# Altium PCB interface.PcbDoc
Units mil, origin at the board's own origin, x right, y up, seen from the top; angles counter-clockwise.
Board outline 1335.98 x 1844.06 mil, 2 copper layers (Top Layer, Bottom Layer); 19 components, 16 nets, 74 pads, 1 vias.
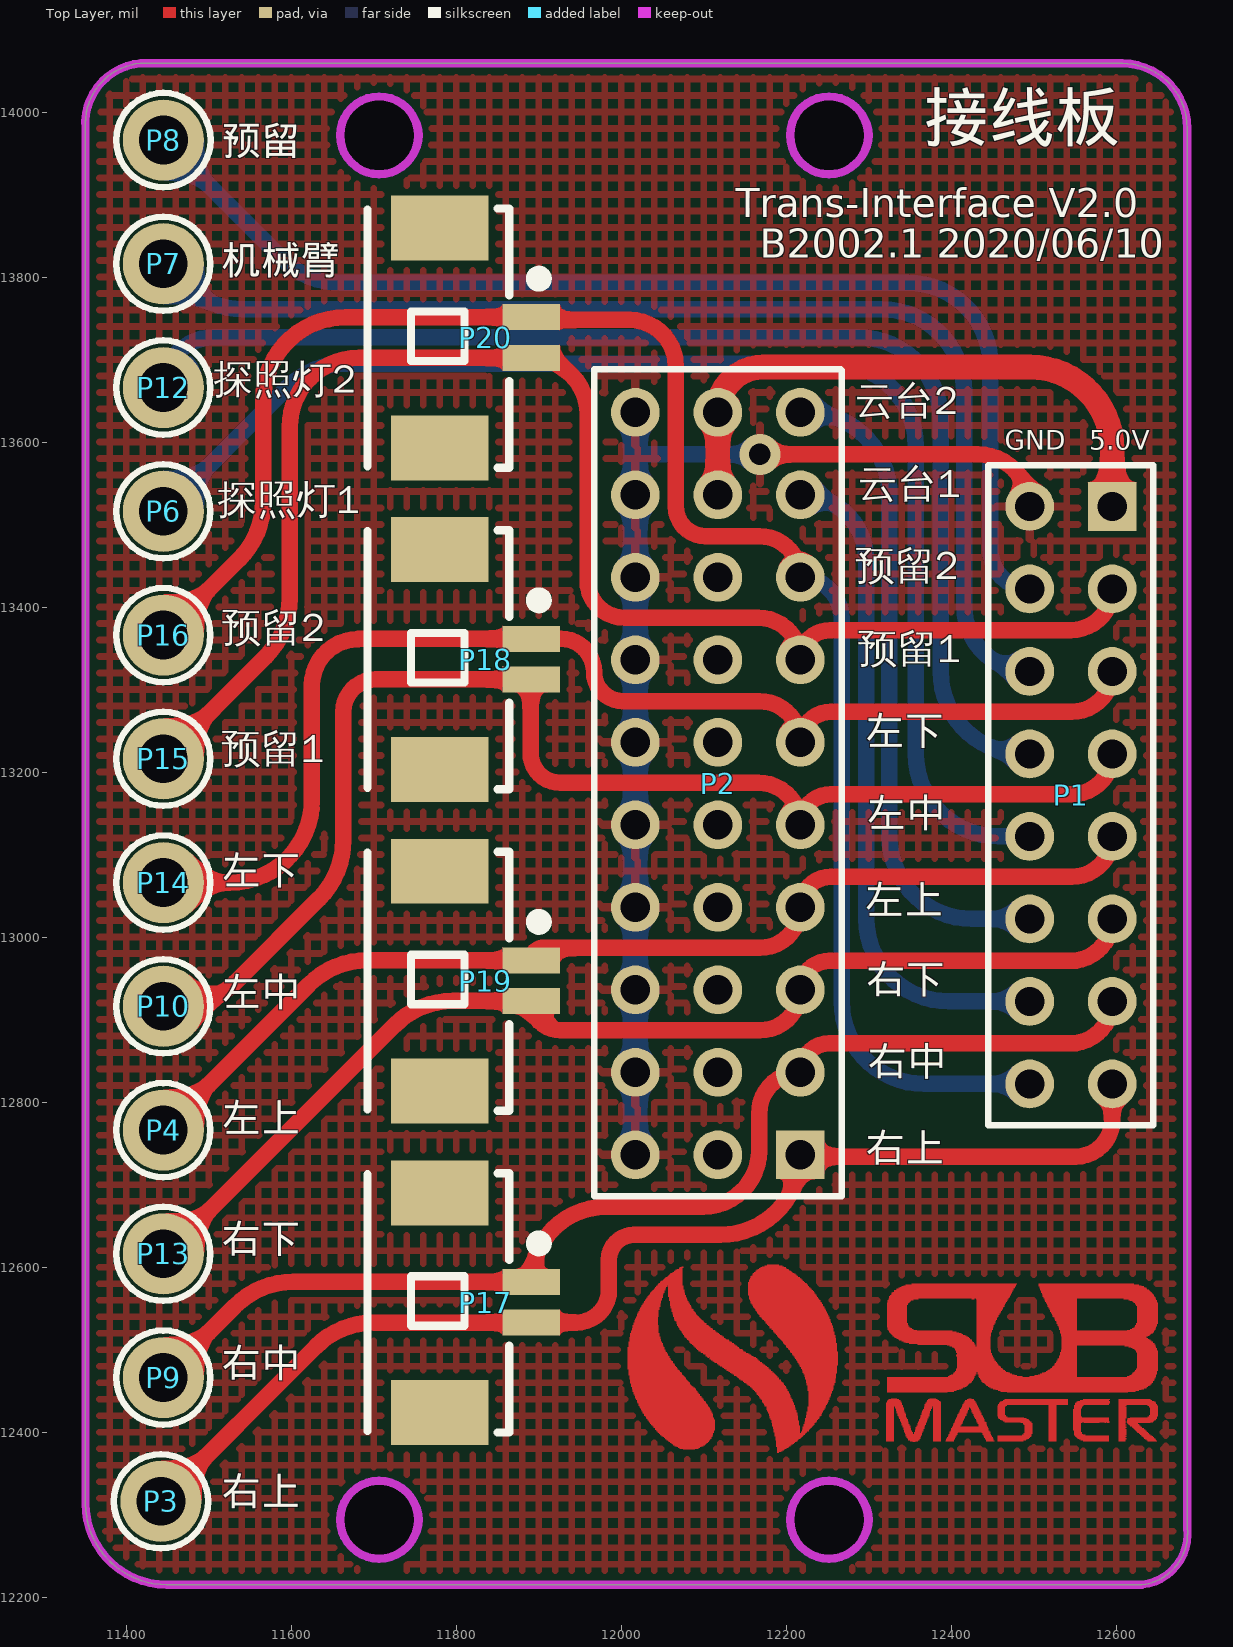
[diagram p0: Top Layer view]
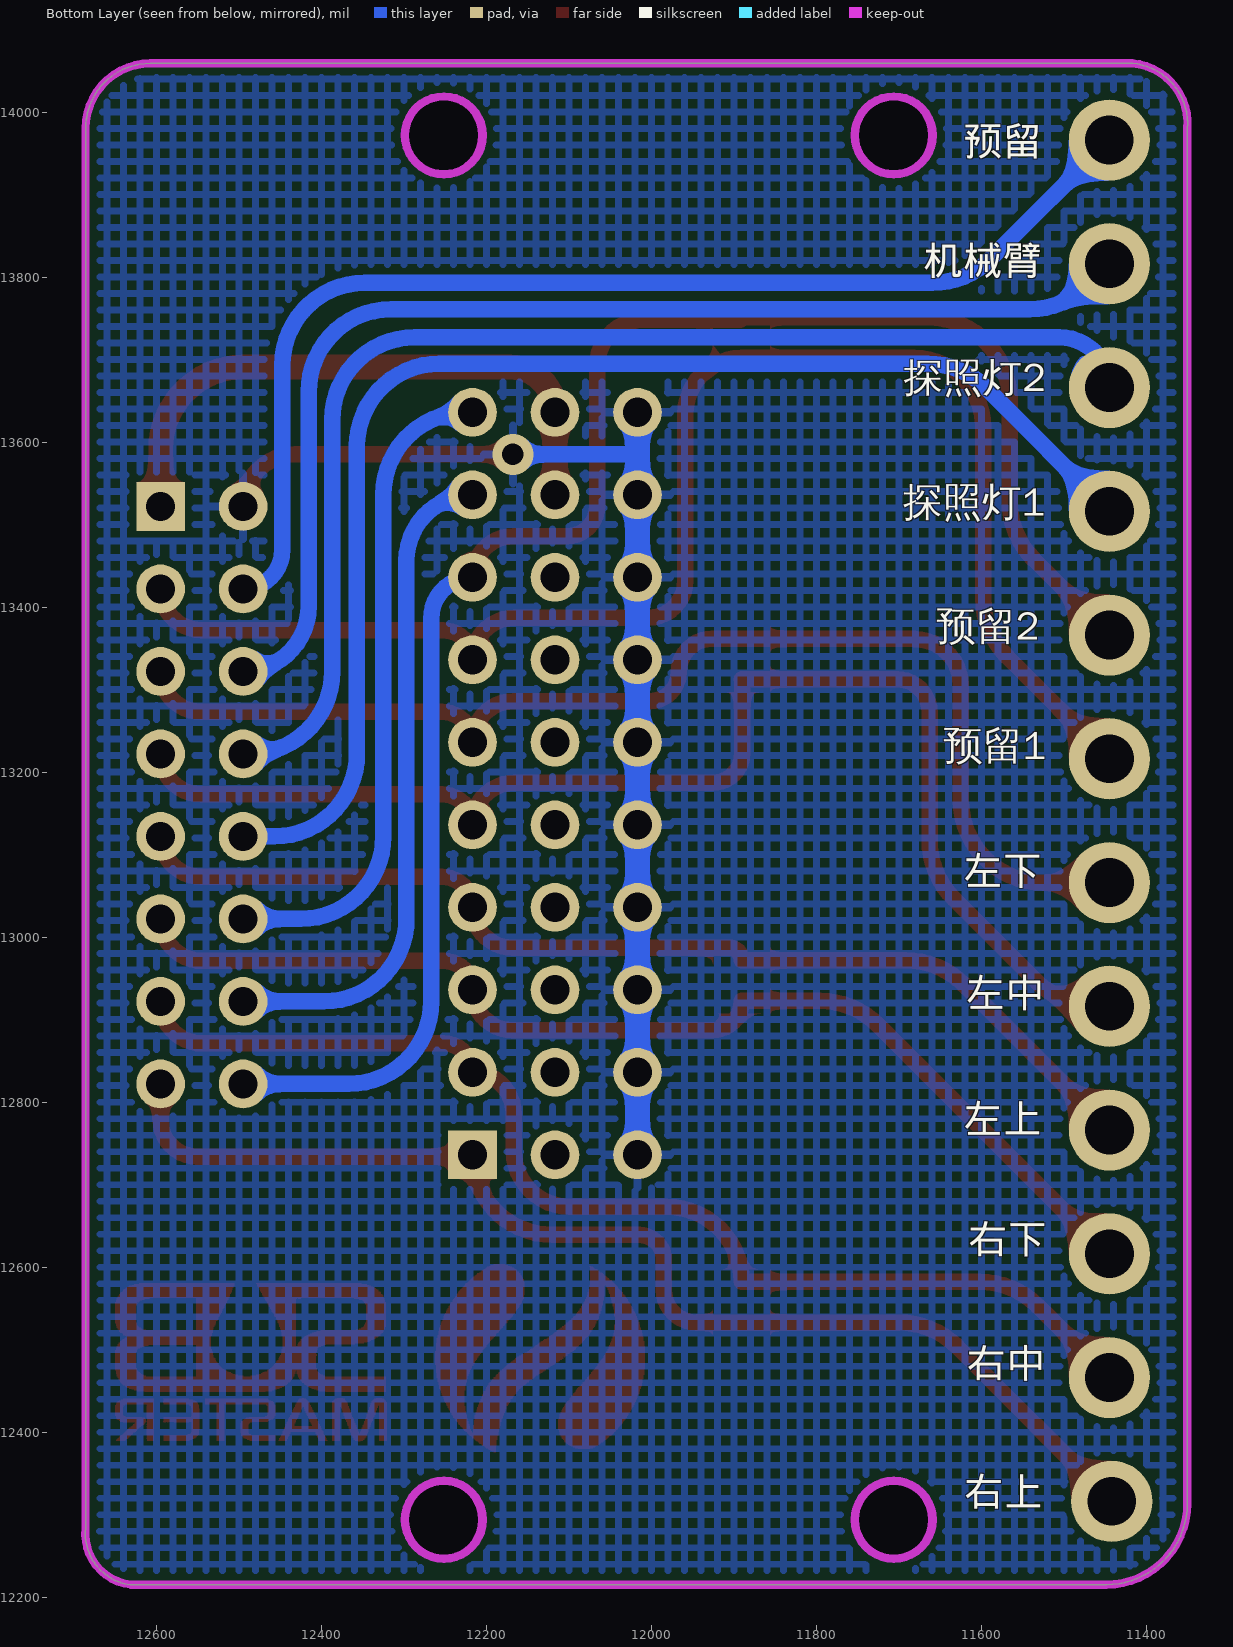
[diagram p1: Bottom Layer view, seen from below]

## Layer stack, top to bottom
Top Solder: solder mask 0.4, Solder Resist, Dk 3.5
Top Layer: signal copper 1.4
Dielectric 1: dielectric 12.6, FR-4, Dk 4.8
Bottom Layer: signal copper 1.4
Bottom Solder: solder mask 0.4, Solder Resist, Dk 3.5

## Board outline
11350.47,12313.53 11350.47,13980.31 cw(c11423.27,13986.26) 11417.32,14059.06 12607.17,14059.06 cw(c12607.17,13980.31) 12685.91,13980.31 12685.91,12283.46 cw(c12624.22,12276.69) 12631,12215 11449,12215 cw(c11449,12313.53)
cut-out: 11711.37,13924.47 cw(c11711.37,13971.72) 11664.13,13971.72 cw(c11711.37,13971.72) 11711.37,14018.96 cw(c11711.37,13971.72) 11758.61,13971.72 cw(c11711.37,13971.72)
cut-out: 12256.65,13924.47 cw(c12256.65,13971.72) 12209.4,13971.72 cw(c12256.65,13971.72) 12256.65,14018.96 cw(c12256.65,13971.72) 12303.89,13971.72 cw(c12256.65,13971.72)
cut-out: 12256.65,12246.45 cw(c12256.65,12293.69) 12209.4,12293.69 cw(c12256.65,12293.69) 12256.65,12340.94 cw(c12256.65,12293.69) 12303.89,12293.69 cw(c12256.65,12293.69)
cut-out: 11711.37,12246.45 cw(c11711.37,12293.69) 11664.13,12293.69 cw(c11711.37,12293.69) 11711.37,12340.94 cw(c11711.37,12293.69) 11758.61,12293.69 cw(c11711.37,12293.69)

## Design rules (kind name [scope] priority, off if disabled: settings)
Clearance Clearance_1 [All] p1: gap=8
ComponentClearance [All] p1: gap=6 collisioncheckmode=3 verticalgap=10 showdistances=FALSE
PolygonConnect [All] p1: connectstyle=Relief reliefconductorwidth=10 reliefentries=4 polygonreliefangle="90 Angle" airgapwidth=10
RoutingVias [All] p1: holewidth=28 width=50 viastyle="Through Hole" minholewidth=28 minwidth=50 maxholewidth=28 maxwidth=50
SolderMaskExpansion [All] p1: expansion=4
Width [All] p1: maxlimit=200 minlimit=5 preferedwidth=10 minimp=50.000000 maximp=50.000000 favimp=50.000000
29 further rules are at their usual default settings.

## Classes and differential pairs
component class interface: P1 P2 P3 P4 P6 P7 P8 P9 P10 P12 P13 P14 P15 P16 P17 P18 P19 P20

## Components (designator, comment, footprint, x,y, rotation, side; value= is the part's Value field where it differs from the comment)
P1 "2X8" "HEADER 2X8 反向" 12486.22,12825.9 r90 top
P2 "Header 10X3" "Header 10x3" 12217,12736 r90 top
P3 "右上" "PIN 1" 11445.94,12316 r270 top
P4 "左上" "PIN 1" 11448.82,12766 r270 top
P6 "探照灯1" "PIN 1" 11444.88,13519.94 r0 top
P7 "机械臂" "PIN 1" 11448.82,13816 r270 top
P8 "预留" "PIN 1" 11448.94,13966 r270 top
P9 "右中" "PIN 1" 11448.82,12466 r270 top
P10 "左中" "PIN 1" 11448.82,12916 r270 top
P12 "探照灯2" "PIN 1" 11444.88,13669.94 r0 top
P13 "右下" "PIN 1" 11448.82,12616 r270 top
P14 "左下" "PIN 1" 11448.82,13066 r270 top
P15 "预留1" "PIN 1" 11448.82,13216 r270 top
P16 "预留2" "PIN 1" 11448.82,13366 r270 top
P17 "2PIN" MX1.25WS-2P 11779,12688.85 r270 top
P18 "2PIN" MX1.25WS-2P 11779,13468.38 r270 top
P19 "2PIN" MX1.25WS-2P 11779,13078.62 r270 top
P20 "2PIN" MX1.25WS-2P 11779,13858.15 r270 top
? "" "Sub master logo" 12123,12483 r0 top

## Footprints (in the part's own frame and the unit in brackets; to place one, negate y for a bottom-side part, rotate by r counter-clockwise, add the part's x,y. Pads: shape width x height; smd on the part's side, far side on the other; paste and mask are expansions set on the pad)
"HEADER 2X8 反向" [mm]
  round 1.5 hole 0.9: 1(-0.099,-2.763) 2(-0.099,-0.223) 3(2.441,-2.763) 4(2.441,-0.223) 5(4.981,-2.763) 6(4.981,-0.223) 7(7.521,-2.763) 8(7.521,-0.223) 9(10.061,-2.763) 10(10.061,-0.223) 11(12.601,-2.763) 12(12.601,-0.223) 13(15.141,-2.763) 14(15.141,-0.223) 16(17.681,-0.223)
  rect 1.5x1.5 hole 0.9: 15(17.681,-2.763)
  silkscreen extent -1.37,-4.03 18.95,1.05, body extent -1.45,-4.03 18.87,1.05, height 7.58
"Header 10x3" [mm]
  rect 1.5x1.5 hole 0.9: 1(0,0)
  round 1.5 hole 0.9: 2(0,2.54) 3(0,5.08) 4(2.54,0) 5(2.54,2.54) 6(2.54,5.08) 7(5.08,0) 8(5.08,2.54) 9(5.08,5.08) 10(7.62,0) 11(7.62,2.54) 12(7.62,5.08) 13(10.16,0) 14(10.16,2.54) 15(10.16,5.08) 16(12.7,0) 17(12.7,2.54) 18(12.7,5.08) 19(15.24,0) 20(15.24,2.54) 21(15.24,5.08) 22(17.78,0) 23(17.78,2.54) 24(17.78,5.08) 25(20.32,0) 26(20.32,2.54) 27(20.32,5.08) 28(22.86,0) 29(22.86,2.54) 30(22.86,5.08)
  silkscreen extent -1.27,-1.27 24.18,6.35, body extent -1.27,-1.27 24.13,6.35, height 7.58
MX1.25WS-2P [mm]
  rect 2x3 smd: 0(-0.029,0.025) 0(6.735,0.025)
  rect 0.8x1.778 smd: 1(2.714,2.836) 2(3.964,2.836)
  silkscreen extent -0.63,-2.2 7.35,3.27, body extent -0.47,-2.07 7.18,3.12, height 3.4
"PIN 1" [mm]
  round 2.5 hole 1.5: 1(0,-0.1)
  silkscreen extent -1.45,-1.55 1.45,1.35
"Sub master logo" [mil]
  Top Layer drawing of 1550 lines, arcs and shapes, not listed

## Part data
P1: library part "Header 2X8"
P3 P4 P6 P7 P8 P9 P10 P12 P13 P14 P15 P16: library part 测试点, "测试点"
P17 P18 P19 P20: library part 接线端子-2PIN
?: library part "Sub Master logo"

## Via types
v1: diameter 50, hole 26, Top Layer to Bottom Layer, 1 vias

## Nets (pads, with @x,y where several pads share a name; then routed paths per layer and width w, separated by ;. In a path a pad name is that pad's centre, name@x,y a point inside that pad or via, vN(x,y) a via of type N, cw(c..) or ccw(c..) an arc to the next point about the centre after c; other vN are vias at no path point)
DGND: P1.16 P2.3 P2.6 P2.9 P2.12 P2.15 P2.18 P2.21 P2.24 P2.27 P2.30 | length 1414.5
  Top Layer w20: v1(12168,13585) 12432.01,13585 cw(c12432.01,13522.04) P1.16
  Bottom Layer w20: 12017,13586 ccw(c12018,13586) 12018,13585 v1(12168,13585)
  Bottom Layer w30: P2.3 P2.6 P2.9 P2.12 P2.15 P2.18 P2.21 P2.24 P2.27 12017,13586 P2.30
PWM0: P1.1 P2.1 P3.1 P17.2 | length 1440.5
  Top Layer w20: P3.1 11629.5,12503.5 cw(c11700.21,12432.79) 11700.21,12532.79 P17.2 11945.53,12532.79 ccw(c11945.53,12572.25) 11985,12572.25 11985,12609 cw(c12015,12609) 12015,12639 12120,12639 ccw(c12120,12736) P2.1 ccw(c12219,12736) 12219,12734 12551,12734 ccw(c12551,12777.97) 12594.97,12777.97 P1.1
PWM1: P1.3 P2.4 P9.1 P17.1 | length 1407.2
  Top Layer w20: P9.1 11531.59,12552.71 cw(c11602.3,12482) 11602.3,12582 P17.1 cw(c11981.65,12582) 11981.65,12673 12099,12673 ccw(c12099,12741) 12167,12741 12167,12786 cw(c12217,12786) P2.4 cw(c12252,12836) 12252,12871 12543.93,12871 ccw(c12543.93,12922.04) P1.3
PWM2: P1.5 P2.7 P13.1 P19.2 | length 1369.8
  Top Layer w20: P13.1 ccw(c11444.88,12623.53) 11450.2,12618.2 11725.26,12893.26 cw(c11795.98,12822.55) 11795.98,12922.55 P19.2 ccw(c11926.21,12922.55) 11926.21,12887 12168,12887 ccw(c12168,12936) P2.7 cw(c12252,12936) 12252,12971 12543.93,12971 ccw(c12543.93,13022.04) P1.5
PWM3: P1.7 P2.10 P4.1 P19.1 | length 1316.8
  Top Layer w20: P4.1 11621.36,12942.48 cw(c11692.07,12871.77) 11692.07,12971.77 P19.1 cw(c11905.89,12971.77) 11905.89,12987 12168,12987 ccw(c12168,13036) P2.10 cw(c12254,13036) 12254,13073 12545.93,13073 ccw(c12545.93,13122.04) P1.7
PWM4: P1.9 P2.13 P10.1 P18.2 | length 1615.9
  Top Layer w20: P10.1 11461.58,12916 ccw(c11461.58,13016) 11532.29,12945.29 11633.71,13046.71 ccw(c11563,13117.42) 11663,13117.42 11663,13273 cw(c11702.32,13273) 11702.32,13312.32 P18.2@11890,13312.32 ; P18.2 P18.2@11890,13312.32 ; P1.9 cw(c12545.93,13222.04) 12545.93,13173 12254,13173 ccw(c12254,13136) P2.13 ccw(c12166,13136) 12166,13187 11926,13187 cw(c11926,13223) 11890,13223 P18.2@11890,13312.32
PWM5: P1.11 P2.16 P14.1 P18.1 | length 1499.4
  Top Layer w20: P14.1 11525,13066 ccw(c11525,13166) 11625,13166 11625,13305 cw(c11681,13305) 11681,13361 11681,13361.53 P18.1 11926.47,13361.53 cw(c11926.47,13321) 11967,13321 ccw(c12002,13321) 12002,13286 12167,13286 cw(c12167,13236) P2.16 cw(c12254,13236) 12254,13273 12545.93,13273 ccw(c12545.93,13322.04) P1.11
PWM6: P1.13 P2.19 P15.1 P20.2 | length 1850.7
  Top Layer w20: P15.1 11568.71,13339.83 ccw(c11498,13410.54) 11598,13410.54 11598,13618 cw(c11682.09,13618) 11682.09,13702.09 P20.2 cw(c11890.65,13633.74) 11959,13633.74 11959,13432 ccw(c12004,13432) 12004,13387 12166,13387 cw(c12166,13336) P2.19 cw(c12253,13336) 12253,13372 12544.93,13372 ccw(c12544.93,13422.04) P1.13
PWM7: P1.2 P2.22 P16.1 P20.1 | length 2140.8
  Top Layer w20: P16.1@11466,13366 P16.1 11536.71,13457.83 ccw(c11466,13528.54) 11566,13528.54 11566,13651.3 cw(c11666,13651.3) 11666,13751.3 P20.1 ccw(c11893.95,13751.3) 11893.95,13748 12010,13748 cw(c12010,13692) 12066,13692 12066,13522 ccw(c12102,13522) 12102,13486 12167,13486 cw(c12167,13436) P2.22
  Bottom Layer w20: P2.22 cw(c12217,13386) 12267,13386 12267,12922.04 ccw(c12367,12922.04) 12367,12822.04 P1.2
PWM8: P1.4 P2.25 | length 814.7
  Bottom Layer w20: P2.25 cw(c12217,13456) 12297,13456 12297,13022.04 ccw(c12397,13022.04) 12397,12922.04 P1.4
PWM9: P1.6 P2.28 | length 806.1
  Bottom Layer w20: P2.28 12225,13636 cw(c12225,13536) 12325,13536 12325,13122.04 ccw(c12425,13122.04) 12425,13022.04 P1.6
PWM10: P1.8 P6.1 | length 1607
  Bottom Layer w20: P6.1 11594.59,13665.71 cw(c11665.3,13595) 11665.3,13695 12257,13695 cw(c12257,13595) 12357,13595 12357,13222.04 ccw(c12457,13222.04) 12457,13122.04 P1.8
PWM11: P1.10 P12.1 | length 1504
  Bottom Layer w20: P12.1 cw(c11505.88,13666) 11505.88,13727 12287,13727 cw(c12287,13627) 12387,13627 12387,13322.04 ccw(c12487,13322.04) 12487,13222.04 P1.10
PWM12: P1.12 P7.1 | length 1430.5
  Bottom Layer w20: P7.1 11470.59,13790.29 ccw(c11541.3,13861) 11541.3,13761 12315.55,13761 cw(c12315.55,13661) 12415.55,13661 12415.55,13401.46 ccw(c12494.97,13401.46) P1.12
PWM13: P1.14 P8.1 | length 1425
  Bottom Layer w20: P8.1 11588.71,13822.29 ccw(c11659.42,13893) 11659.42,13793 12347.44,13793 cw(c12347.44,13693) 12447.44,13693 12447.44,13469.57 ccw(c12494.97,13469.57) P1.14
VDD_5.0V: P1.15 P2.26 P2.29 | length 735.4
  Top Layer w30: P2.26 P2.29 cw(c12172,13636) 12172,13691 12494.97,13691 cw(c12494.97,13591) 12594.97,13591 P1.15
pads on no net: P2.2 P2.5 P2.8 P2.11 P2.14 P2.17 P2.20 P2.23 P17.0 P18.0 P19.0 P20.0

## Polygon pours and split planes (outlines as drawn)
DGND on Bottom Layer "Top Layer-No Net" (hatched 90Degree grid 20 track 8, remove dead copper, pour order 16): 11417.32,14059.06 ccw(c11417.32,13992.2) 11350.47,13992.2 11350.47,13980.31 11350.47,12313.53 ccw(c11449,12313.53) 11449,12215 12617.44,12215 ccw(c12617.44,12283.46) 12685.91,12283.46 12685.91,13980.31 ccw(c12607.17,13980.31) 12607.17,14059.06
DGND on Top Layer "Top Layer-No Net" (solid, remove dead copper, pour order 14): 11417.32,14059.06 ccw(c11417.32,13992.2) 11350.47,13992.2 11350.47,13980.31 11350.47,12313.53 ccw(c11449,12313.53) 11449,12215 12631,12215 ccw(c12631,12269.91) 12685.91,12269.91 12685.91,12283.46 12685.91,13980.31 ccw(c12607.17,13980.31) 12607.17,14059.06

## Keep-outs
Keep-Out Layer:
  circle w10: c11706.37,13971.72 r47.24
  circle w10: c12251.65,13971.72 r47.24
  circle w10: c12251.65,12293.69 r47.24
  circle w10: c11706.37,12293.69 r47.24
  lines w10: 11350.47,12313.53 ccw(c11449,12313.53) 11449,12215 12631,12215 ccw(c12624.22,12276.69) 12685.91,12283.46 12685.91,13980.31 ccw(c12607.17,13980.31) 12607.17,14059.05 12458,14059.06 11417.32,14059.06 ccw(c11423.27,13986.26) 11350.47,13980.31 11350.47,12313.53

## Silkscreen, mask and mechanical layers (free items; w line width, h text height)
Top Overlay:
  text "接线板" at 12366,13946 h100
  text "Trans-Interface V2.0" at 12138.42,13861 h60
  text "B2002.1 2020/06/10" at 12167.67,13812 h60
  text "云台2" at 12283.78,13621.94 h60
  text "GND" at 12464.57,13582.68 h40
  text "5.0V" at 12566.93,13582.68 h40
  text "云台1" at 12287.32,13521.42 h60
  text "预留2" at 12283.83,13421.97 h60
  text "预留1" at 12287.37,13321.46 h60
  text "左下" at 12295.69,13221.62 h60
  text "左中" at 12297.64,13122.37 h60
  text "左上" at 12294.96,13016.48 h60
  text "右下" at 12296.91,12920.07 h60
  text "右中" at 12298.86,12820.82 h60
  text "右上" at 12296.18,12716.15 h60
Bottom Overlay:
  text "预留" at 11622,13936 h60
  text "机械臂" at 11670,13791 h60
  text "探照灯2" at 11694,13650 h60
  text "探照灯1" at 11695,13499 h60
  text "预留2" at 11654,13349 h60
  text "预留1" at 11646,13204 h60
  text "左下" at 11622,13052 h60
  text "左中" at 11619,12904 h60
  text "左上" at 11622,12751 h60
  text "右下" at 11616,12605 h60
  text "右中" at 11618,12455 h60
  text "右上" at 11621,12299 h60